# Altium PCB PCB3.PcbDoc
Units mm, origin at the board's own origin, x right, y up, seen from the top; angles counter-clockwise.
Board outline 55.63 x 78.99 mm, 2 copper layers (Top Layer, Bottom Layer); 6 components, 18 nets, 56 pads, 2 vias.
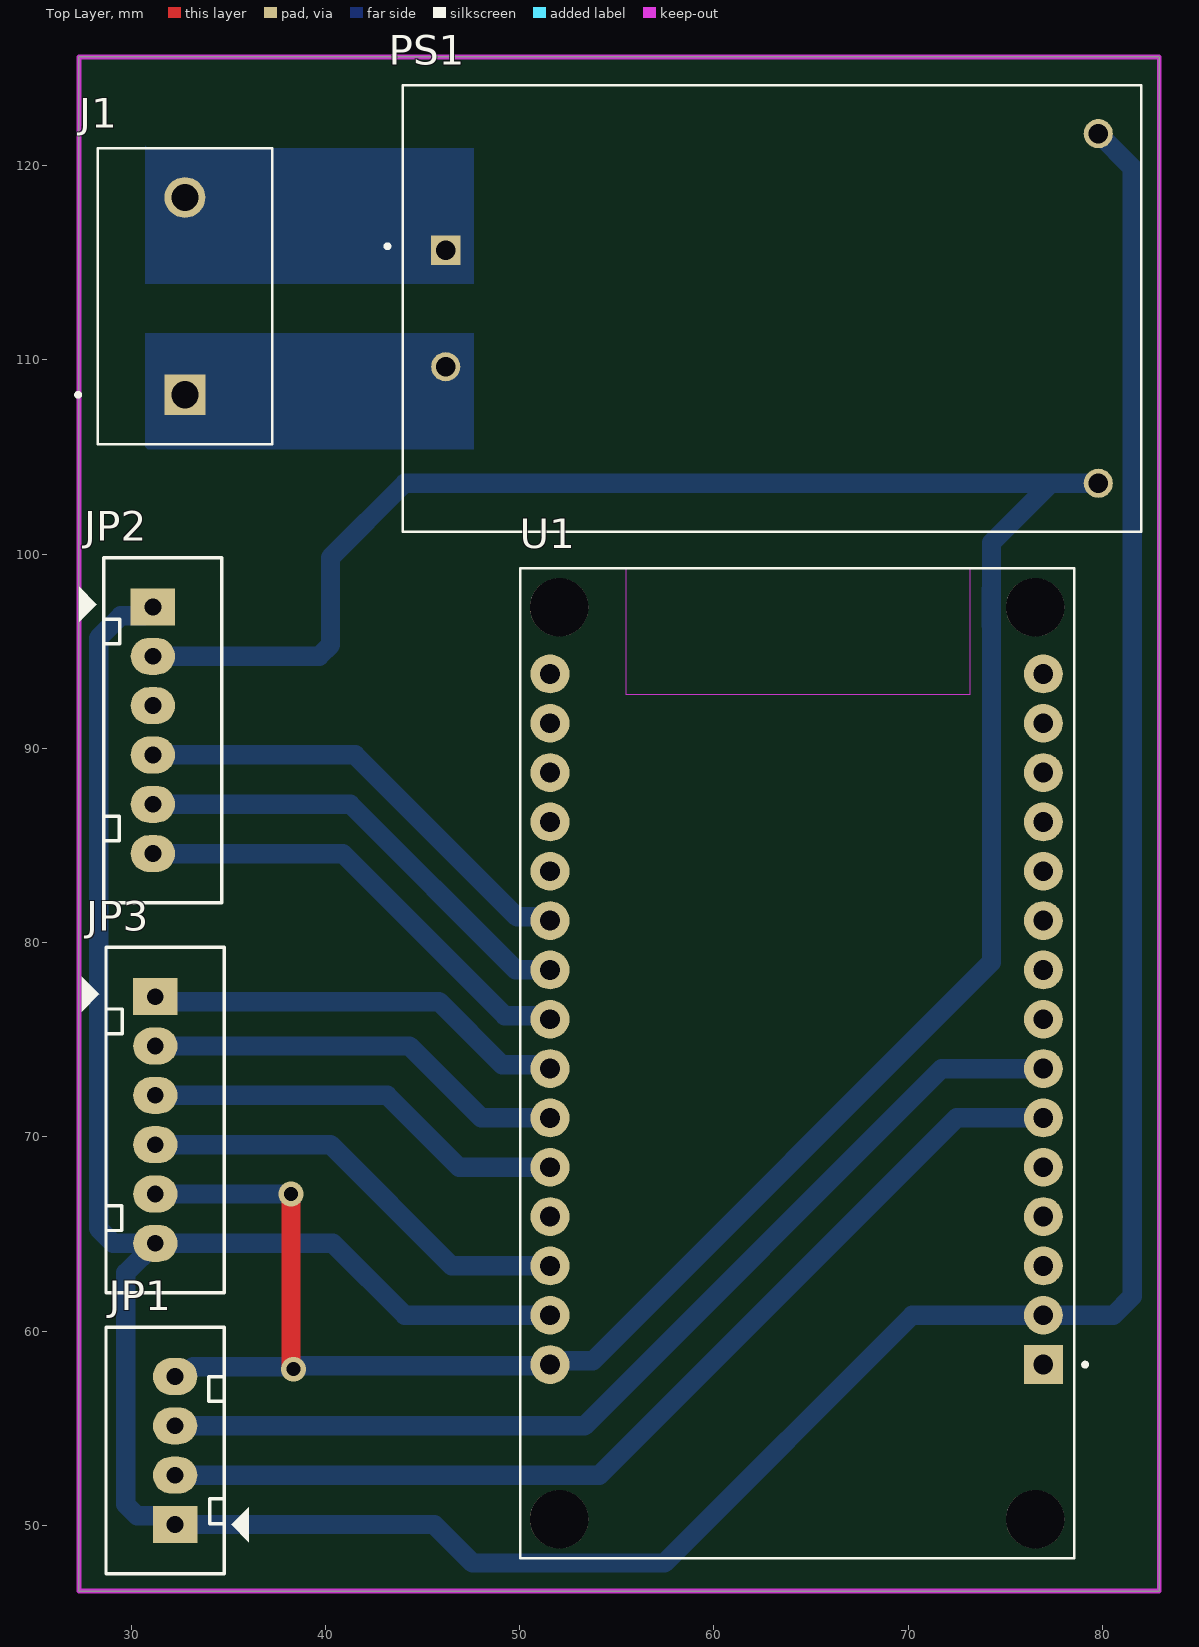
[diagram p0: Top Layer view]
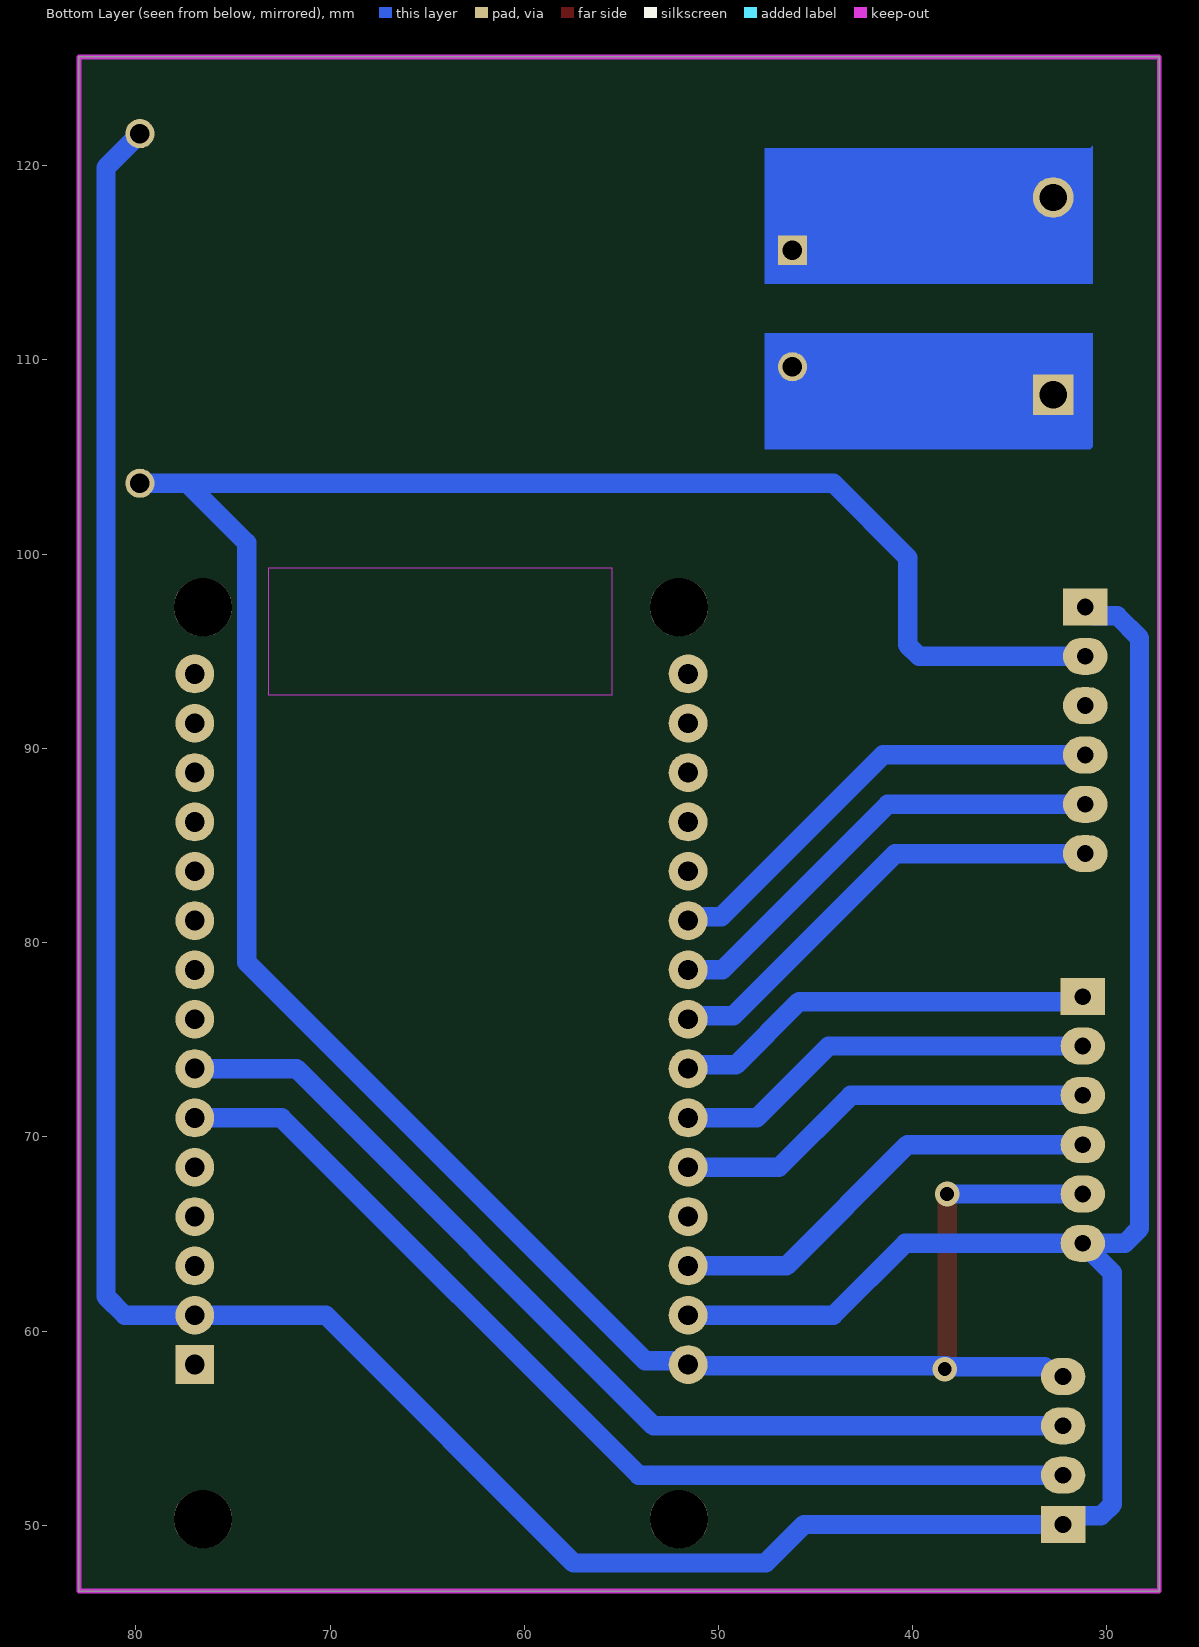
[diagram p1: Bottom Layer view, seen from below]
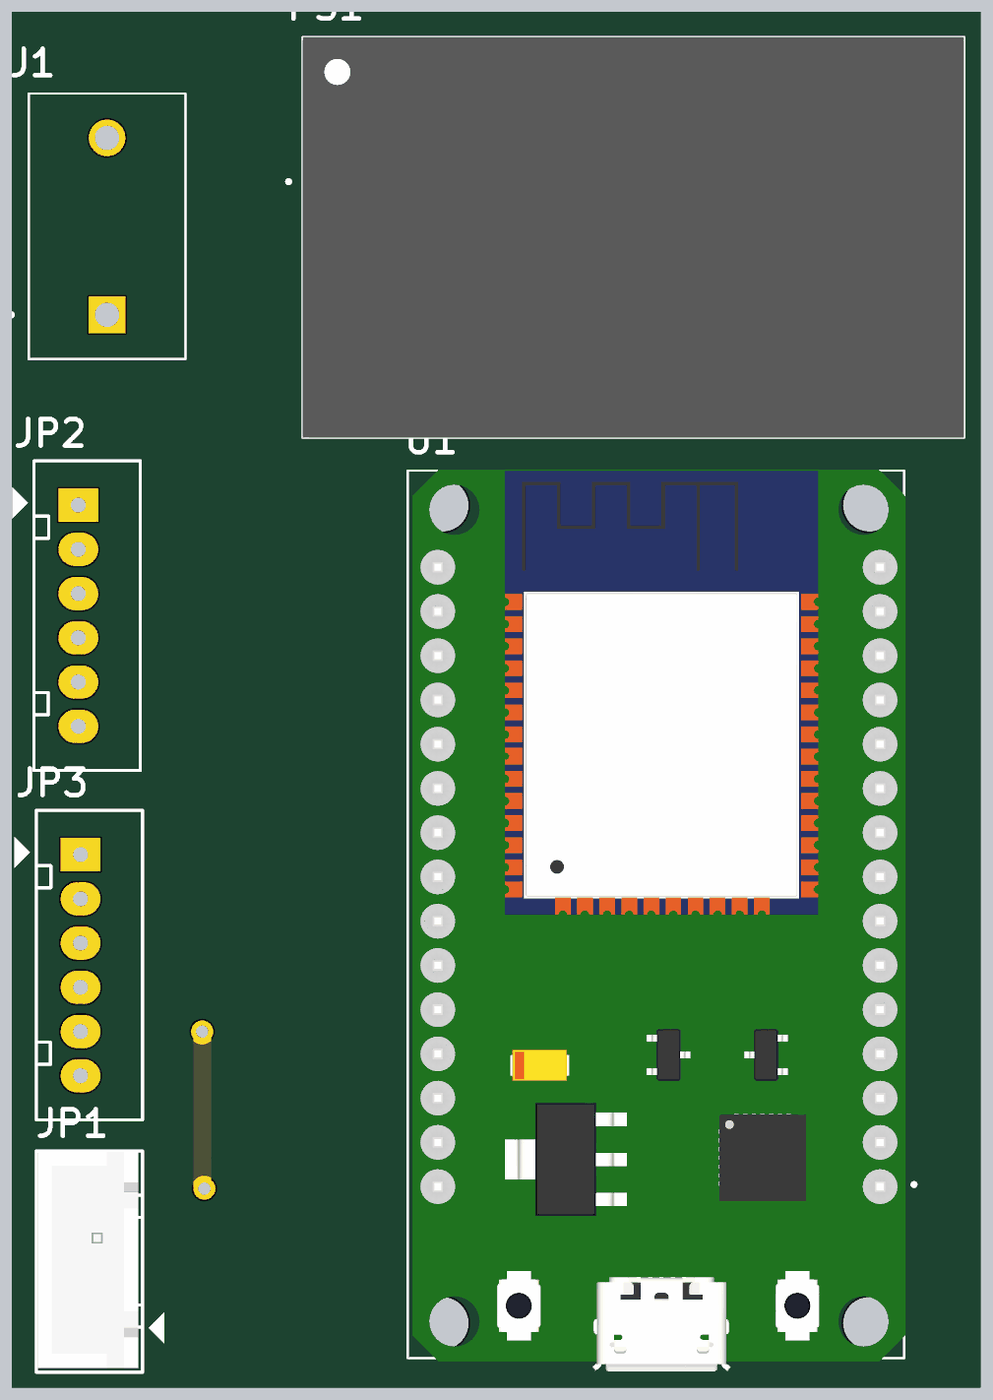
[diagram p2: 3D render of the assembled board from above, using the file's embedded part models]

## Layer stack, top to bottom
Top Solder: solder mask 0.0102, Solder Resist, Dk 3.5
Top Layer: signal copper 0.0356
Dielectric 1: dielectric 0.32, FR-4, Dk 4.8
Bottom Layer: signal copper 0.0356
Bottom Solder: solder mask 0.0102, Solder Resist, Dk 3.5

## Board outline
27.305,46.609 27.305,125.603 82.931,125.603 82.931,46.609

## Design rules (kind name [scope] priority, off if disabled: settings)
Clearance [All] p1: gap=0.254 ignorepadtopadclearanceinfootprint=FALSE
PolygonConnect [All] p1: connectstyle=Relief reliefconductorwidth=0.254 reliefentries=4 polygonreliefangle="90 Angle" airgapwidth=0.254
RoutingVias [All] p1: holewidth=0.711 width=1.27 viastyle="Through Hole" minholewidth=0.711 minwidth=1.27 maxholewidth=0.711 maxwidth=1.27
SolderMaskExpansion [All] p1: expansion=0.102 istentingtop=FALSE
Width [All] p1: maxlimit=1 minlimit=1 preferedwidth=1 minimp=50.000000 maximp=50.000000 favimp=50.000000
30 further rules are at their usual default settings.

## Components (designator, comment, footprint, x,y, rotation, side; value= is the part's Value field where it differs from the comment)
J1 "Terminal_2" TE_282843-2 32.766,113.284 r90 top
JP1 "JP4" CON4 32.258,50.038 r90 top value="Connector 4"
JP2 "JP6" CON6 31.115,97.282 r270 top value="Connector 6"
JP3 "JP6" CON6 31.242,77.216 r270 top value="Connector 6"
PS1 "HLK-5M05" CONV_HLK-5M05 62.992,112.649 r0 top
U1 "ESP32-DEVKIT-V1" MODULE_ESP32_DEVKIT_V1 64.262,73.787 r180 top

## Footprints (in the part's own frame and the unit in brackets; to place one, negate y for a bottom-side part, rotate by r counter-clockwise, add the part's x,y. Pads: shape width x height; smd on the part's side, far side on the other; paste and mask are expansions set on the pad)
CON4 [mil] "CON4"
  rect 75x90 hole 34: 1(0,0)
  oval 75x90 hole 34: 2(100,0) 3(200,0) 4(300,0)
  silkscreen extent -100,-150 400,140, body extent -90,-90 398,136, height 276
CON6 [mil] "CON6"
  rect 75x90 hole 34: 1(0,0)
  oval 75x90 hole 34: 2(100,0) 3(200,0) 4(300,0) 5(400,0) 6(500,0)
  silkscreen extent -100,-150 600,140
CONV_HLK-5M05 [mm]
  rect 1.5x1.5 / inner round 1.5 / far side rect 1.5x1.5 hole 1: 1(-16.8,3)
  round 1.5 hole 1: 2(-16.8,-3) 3(16.8,9) 4(16.8,-9)
  silkscreen extent -19.9,-11.5 19,11.5, body extent -19,-11.5 19,11.5, height 23
MODULE_ESP32_DEVKIT_V1 [mm]
  rect 2x2 / inner round 2 / far side rect 2x2 hole 1.02: 1(-12.7,15.515)
  round 2 hole 1.02: 2(-12.7,12.975) 3(-12.7,10.435) 4(-12.7,7.895) 5(-12.7,5.355) 6(-12.7,2.815) 7(-12.7,0.275) 8(-12.7,-2.265) 9(-12.7,-4.805) 10(-12.7,-7.345) 11(-12.7,-9.885) 12(-12.7,-12.425) 13(-12.7,-14.965) 14(-12.7,-17.505) 15(-12.7,-20.045) 16(12.7,-20.045) 17(12.7,-17.505) 18(12.7,-14.965) 19(12.7,-12.425) 20(12.7,-9.885) 21(12.7,-7.345) 22(12.7,-4.805) 23(12.7,-2.265) 24(12.7,0.275) 25(12.7,2.815) 26(12.7,5.355) 27(12.7,7.895) 28(12.7,10.435) 29(12.7,12.975) 30(12.7,15.515)
  round 3 hole 3 unplated: ""(-12.28,23.475) ""(-12.28,-23.475) ""(12.23,23.475) ""(12.23,-23.475)
  Keep-Out Layer region: 8.78,-25.475 -8.91,-25.475 -8.91,-18.985 8.78,-18.985
  Keep-Out Layer region: 8.78,-25.475 -8.91,-25.475 -8.91,-18.985 8.78,-18.985
  silkscreen extent -14.95,-25.48 14.23,25.48, body extent -14.35,-25.53 13.95,26.24, height 4.7
TE_282843-2 [mm]
  rect 2.1x2.1 hole 1.4: 1(-5.08,0)
  round 2.1 hole 1.4: 2(5.08,0)
  silkscreen extent -7.62,-4.5 7.62,5.6

## Part data
J1: library part 282843-2, Package=None, Availability=Unavailable, MF="{'manufacturer': 'TE Connectivity'}", MP=282843-2, Price=None
JP1: library part Con4, "Connector 4"
JP2 JP3: library part Con6, "Connector 6"
PS1: "AC DC 220V to 5V 5W 5Watt Isolated Switching Step-Down Power Supply Module Converter", Package=Package, Availability="Not in stock", Check_prices=https://www.snapeda.com/parts/HLK-5M05/Hi-link/view-part/?ref=eda, MF=Hi-link, MP=HLK-5M05, Price=None, SnapEDA_Link=https://www.snapeda.com/parts/HLK-5M05/Hi-link/view-part/?ref=snap
U1: "Dual core, Wi-Fi: 2.4 GHz up to 150 Mbits/s,BLE (Bluetooth Low Energy) and legacy Bluetooth, 32 bits, Up to 240 MHz", Package=None, Availability="Not in stock", Check_prices=https://www.snapeda.com/parts/ESP32-DEVKIT-V1/Do+it/view-part/?ref=eda, MF="Do it", MP=ESP32-DEVKIT-V1, Price=None, SnapEDA_Link=https://www.snapeda.com/parts/ESP32-DEVKIT-V1/Do+it/view-part/?ref=snap

## Via types
v1: diameter 1.27, hole 0.711, Top Layer to Bottom Layer, 2 vias

## Nets (pads, with @x,y where several pads share a name; then routed paths per layer and width w, separated by ;. In a path a pad name is that pad's centre, name@x,y a point inside that pad or via, vN(x,y) a via of type N, cw(c..) or ccw(c..) an arc to the next point about the centre after c; other vN are vias at no path point)
+5: JP1.4 JP2.2 JP3.5 PS1.4 U1.30 | length 147.9
  Top Layer w1: v1(38.227,67.056) 38.227,58.239 38.354,58.112 v1(38.354,58.039)
  Bottom Layer w1: JP2.2 39.673,94.742 40.259,95.328 40.259,99.822 44.086,103.649 77.36,103.649 ; JP3.5 v1(38.227,67.056) ; JP1.4 32.693,57.658 33.201,58.166 38.227,58.166 38.28,58.219 51.509,58.219 U1.30 51.753,58.463 53.764,58.463 74.295,78.994 74.295,96.321 74.288,96.328 74.288,98.196 74.295,98.203 74.295,100.584 77.36,103.649 ; PS1.4 77.36,103.649
D13: JP3.4 U1.28 | length 22.9
  Bottom Layer w1: JP3.4 40.259,69.596 46.503,63.352 U1.28
D14: JP3.3 U1.26 | length 21.9
  Bottom Layer w1: JP3.3 43.18,72.136 46.884,68.432 U1.26
D25: JP2.6 U1.23 | length 24
  Bottom Layer w1: JP2.6 40.894,84.582 49.233,76.243 51.371,76.243 U1.23
D26: JP3.1 U1.24 | length 21.9
  Bottom Layer w1: JP3.1 31.496,76.962 45.847,76.962 49.106,73.703 51.371,73.703 U1.24
D27: JP3.2 U1.25 | length 21.9
  Bottom Layer w1: JP3.2 44.323,74.676 48.027,70.972 U1.25
D32: JP2.4 U1.21 | length 24
  Bottom Layer w1: JP2.4 41.529,89.662 49.868,81.323 51.371,81.323 U1.21
D33: JP2.5 U1.22 | length 24
  Bottom Layer w1: JP2.5 41.275,87.122 49.805,78.592 U1.22
GND: JP1.1 JP2.1 JP3.6 PS1.3 U1.2 U1.29 | length 192.4
  Bottom Layer w1: JP2.1 30.663,96.83 29.47,96.83 28.321,95.68 28.321,65.278 29.083,64.516 JP3.6 ; U1.29 44.09,60.812 40.386,64.516 JP3.6 ; PS1.3 81.534,119.907 81.534,61.779 80.567,60.812 U1.2 70.21,60.812 57.456,48.058 47.573,48.058 45.593,50.038 JP1.1 31.806,50.49 30.304,50.49 29.718,51.076 29.718,62.992 JP3.6
NetDHT11_3: 
NetJ1_1: J1.1 PS1.2 | length 14
  Bottom Layer w1: J1.1 44.747,108.204 PS1.2
NetJ1_2: J1.2 PS1.1 | length 14.6
  Bottom Layer w1: J1.2 43.477,118.364 PS1.1
NetJP7_4: 
NetJP7_5: 
NetJP9_5: 
NetJP9_6: 
RX: JP1.2 U1.6 | length 52.3
  Bottom Layer w1: JP1.2 54.102,52.578 72.496,70.972 U1.6
TX: JP1.3 U1.7 | length 52.3
  Bottom Layer w1: JP1.3 53.34,55.118 71.734,73.512 U1.7
pads on no net: JP2.3 U1. U1.1 U1.3 U1.4 U1.5 U1.8 U1.9 U1.10 U1.11 U1.12 U1.13 U1.14 U1.15 U1.16 U1.17 U1.18 U1.19 U1.20 U1.27

## Keep-outs
Keep-Out Layer:
  the board outline again, w0.254

## Other copper
Bottom Layer:
  region net NetJ1_1: 30.734,111.379 47.625,111.379 47.625,105.41 30.861,105.41 30.734,105.537
  region net NetJ1_2: 30.734,121.031 30.861,120.904 47.625,120.904 47.625,113.919 30.734,113.919